# Altium PCB LED Matrix.PcbDoc
Units mil, origin at the board's own origin, x right, y up, seen from the top; angles counter-clockwise.
Board outline 3897.64 x 3897.64 mil, 4 copper layers (Top Layer, Layer 1, Layer 2, Bottom Layer), stack 23.756 mil thick; 139 components, 105 nets, 345 pads, 111 vias.
Unrouted connection lines stored in the file: 49.
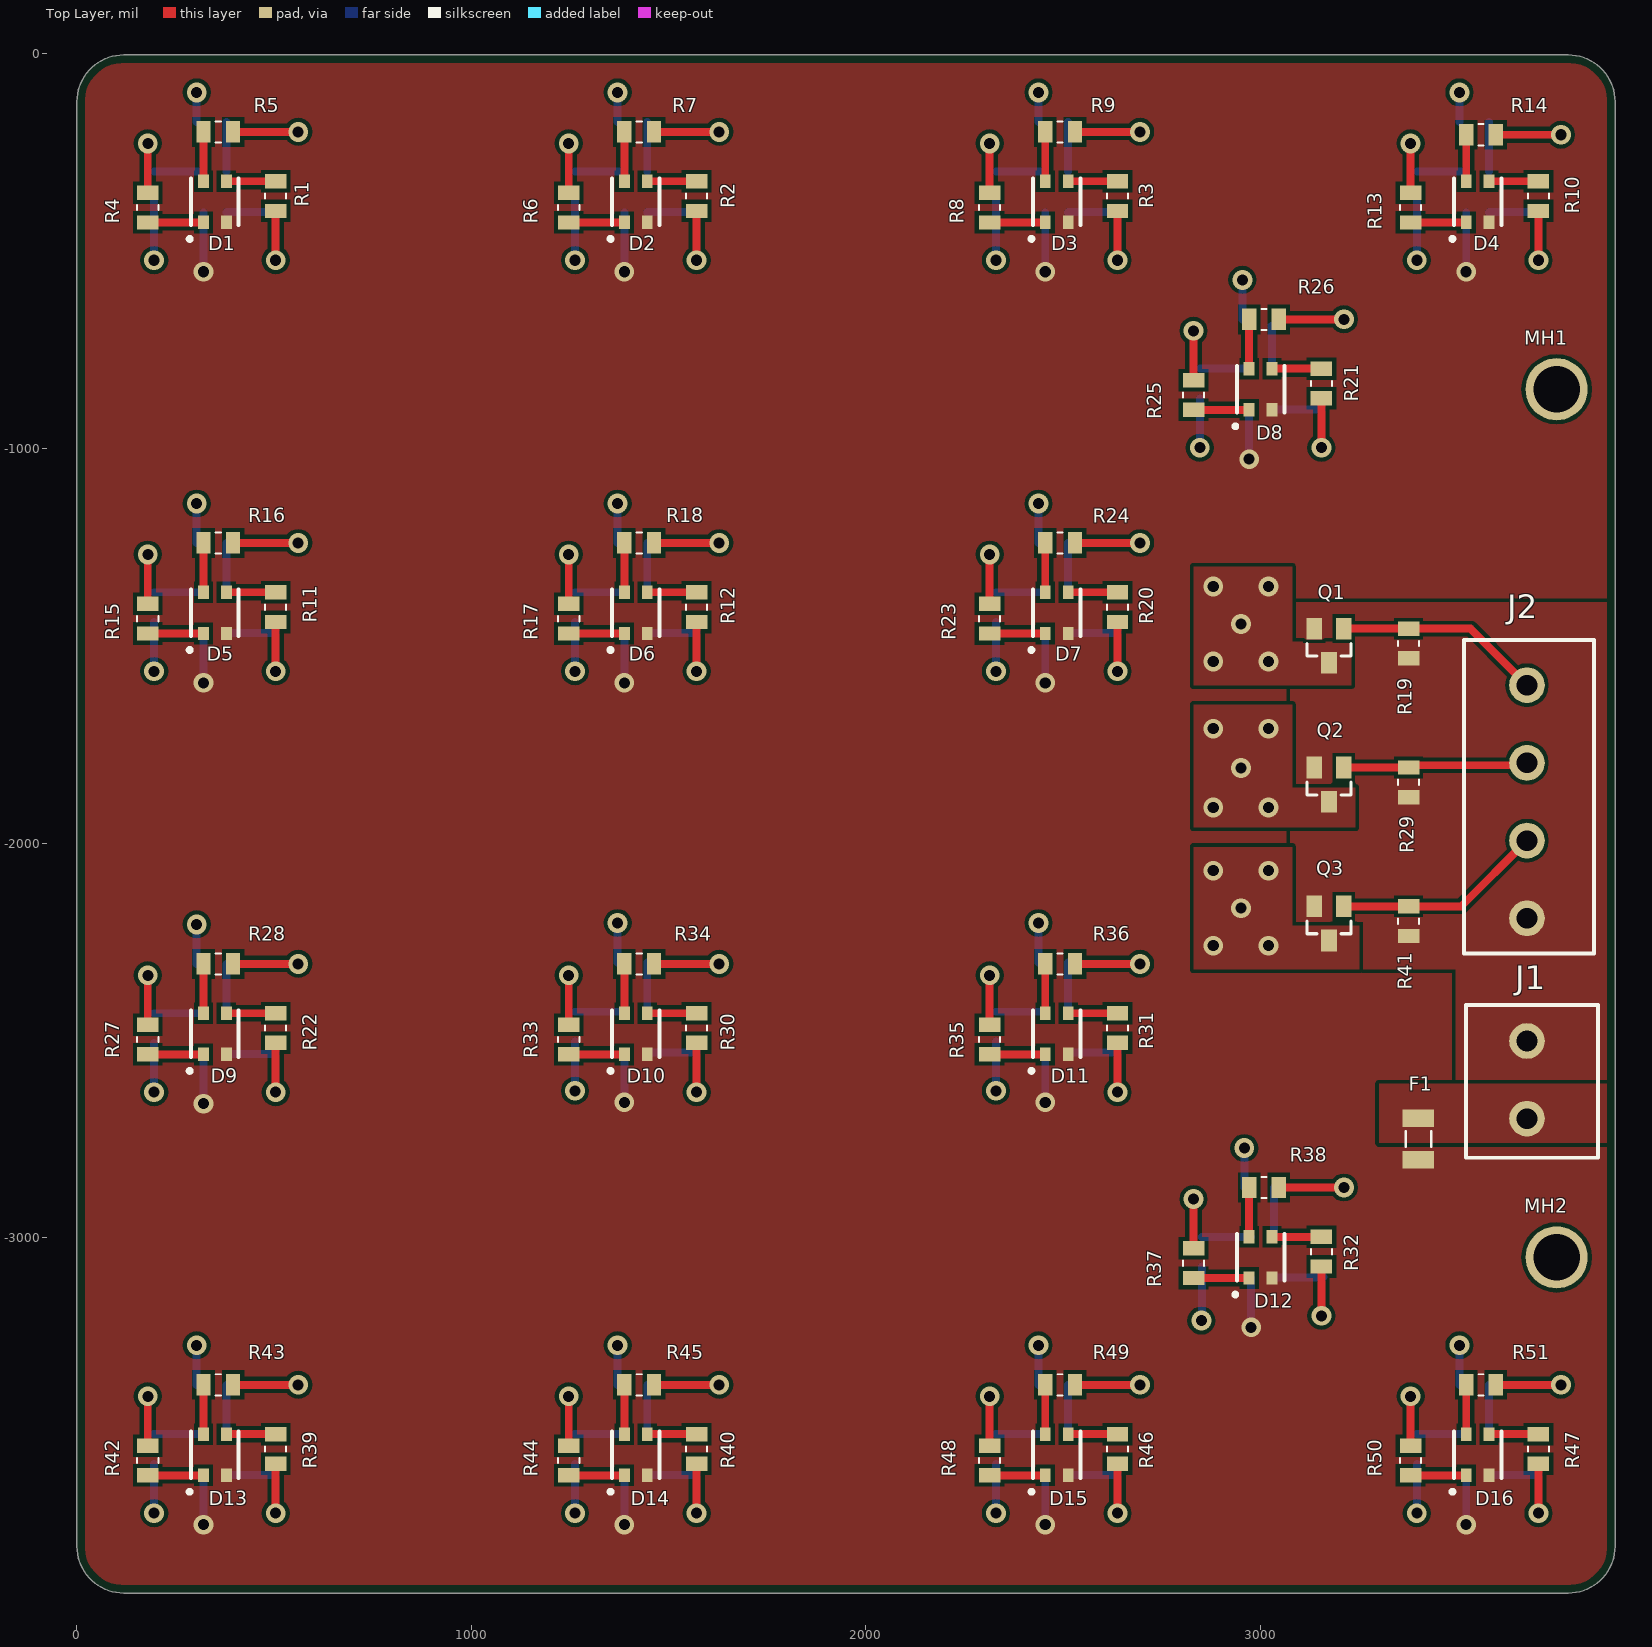
[diagram p0: Top Layer view]
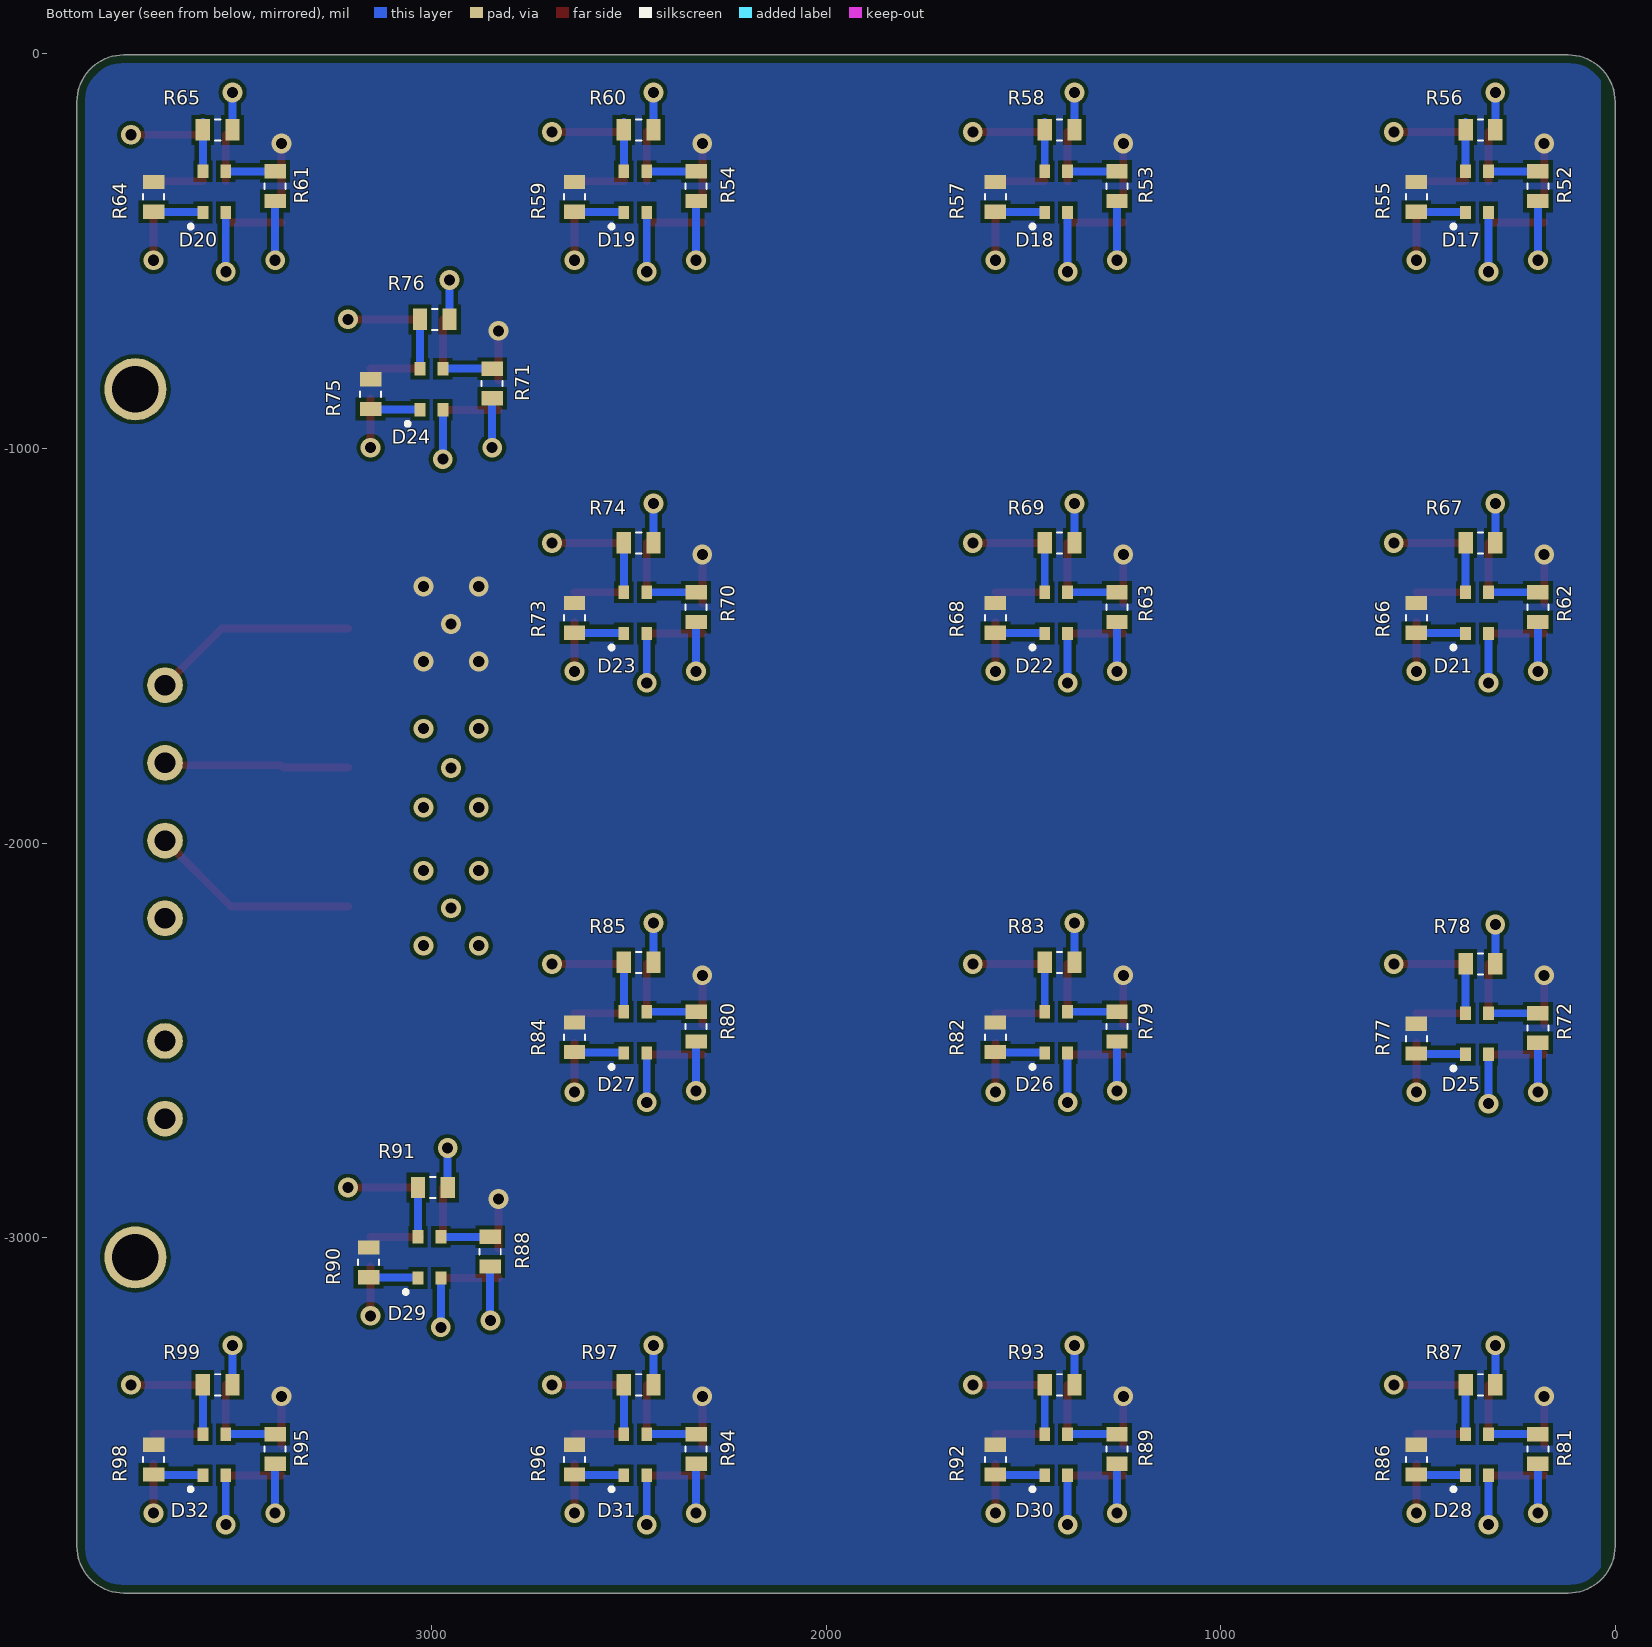
[diagram p1: Bottom Layer view, seen from below]
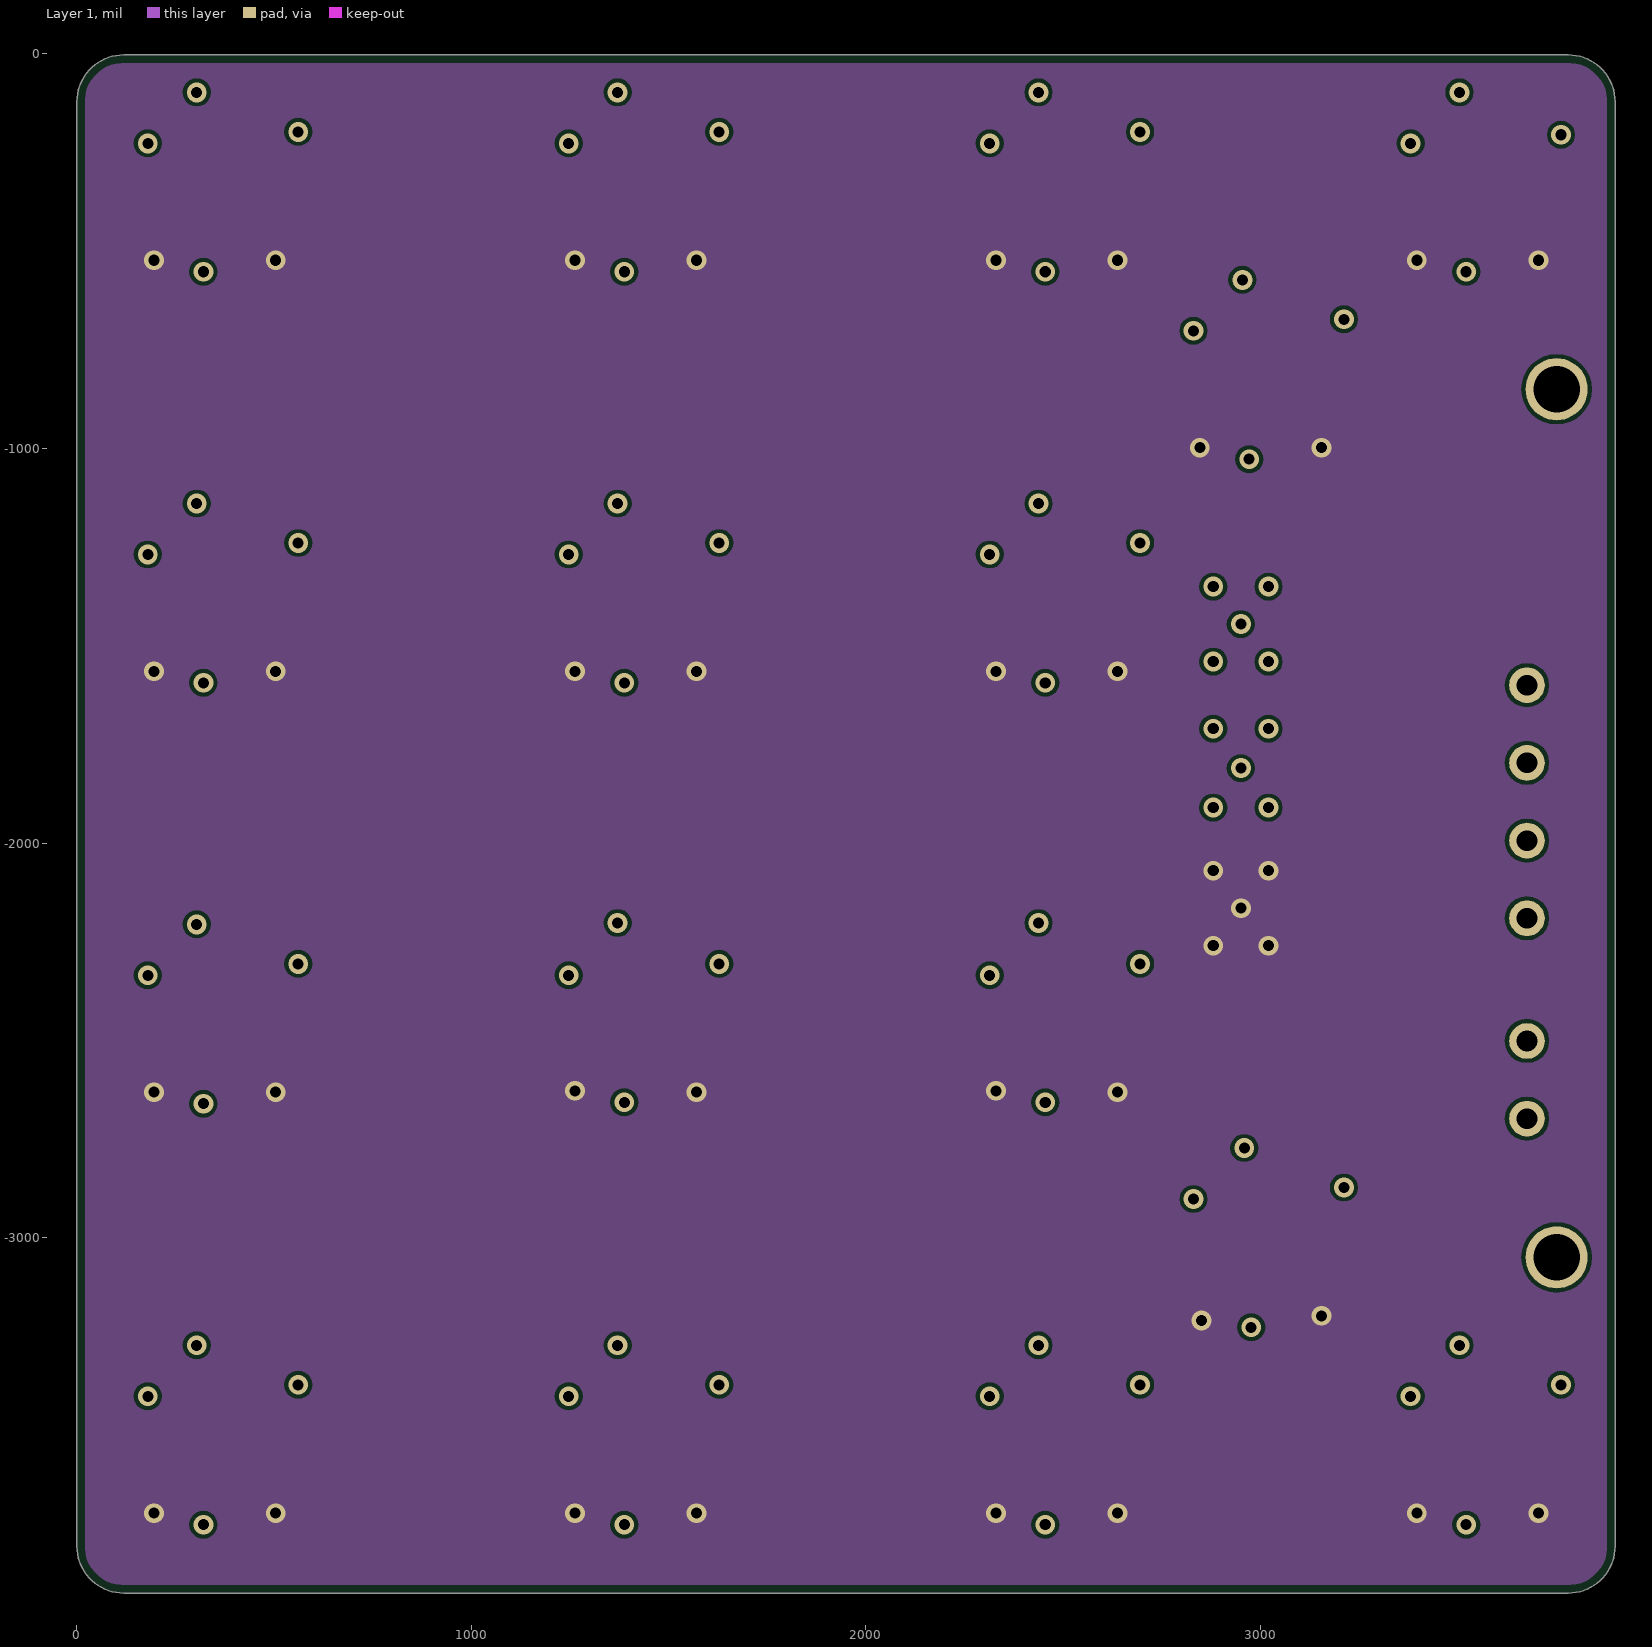
[diagram p2: Layer 1]
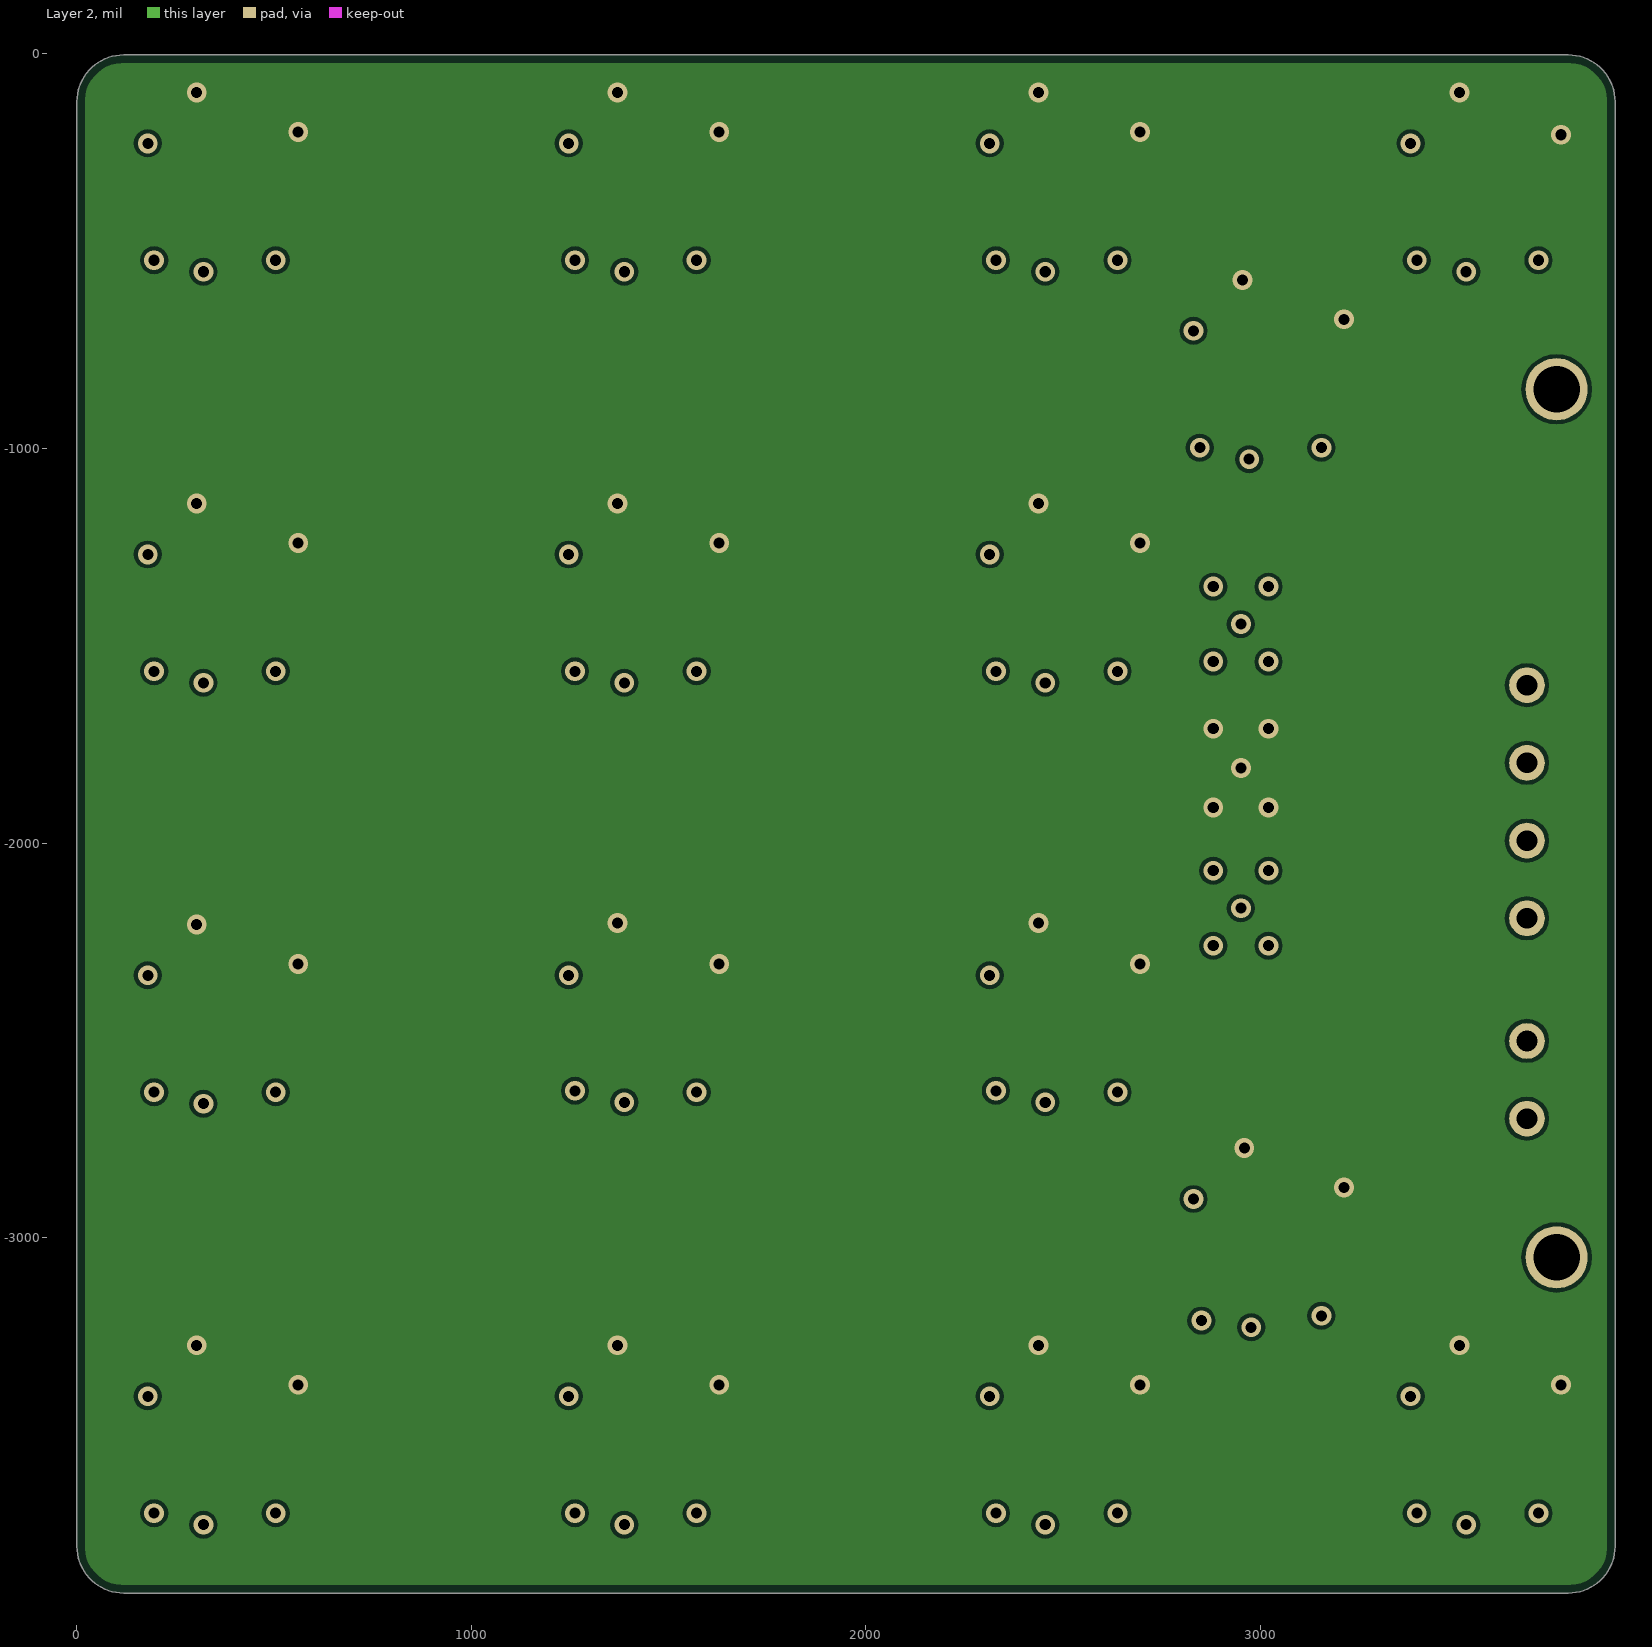
[diagram p3: Layer 2]
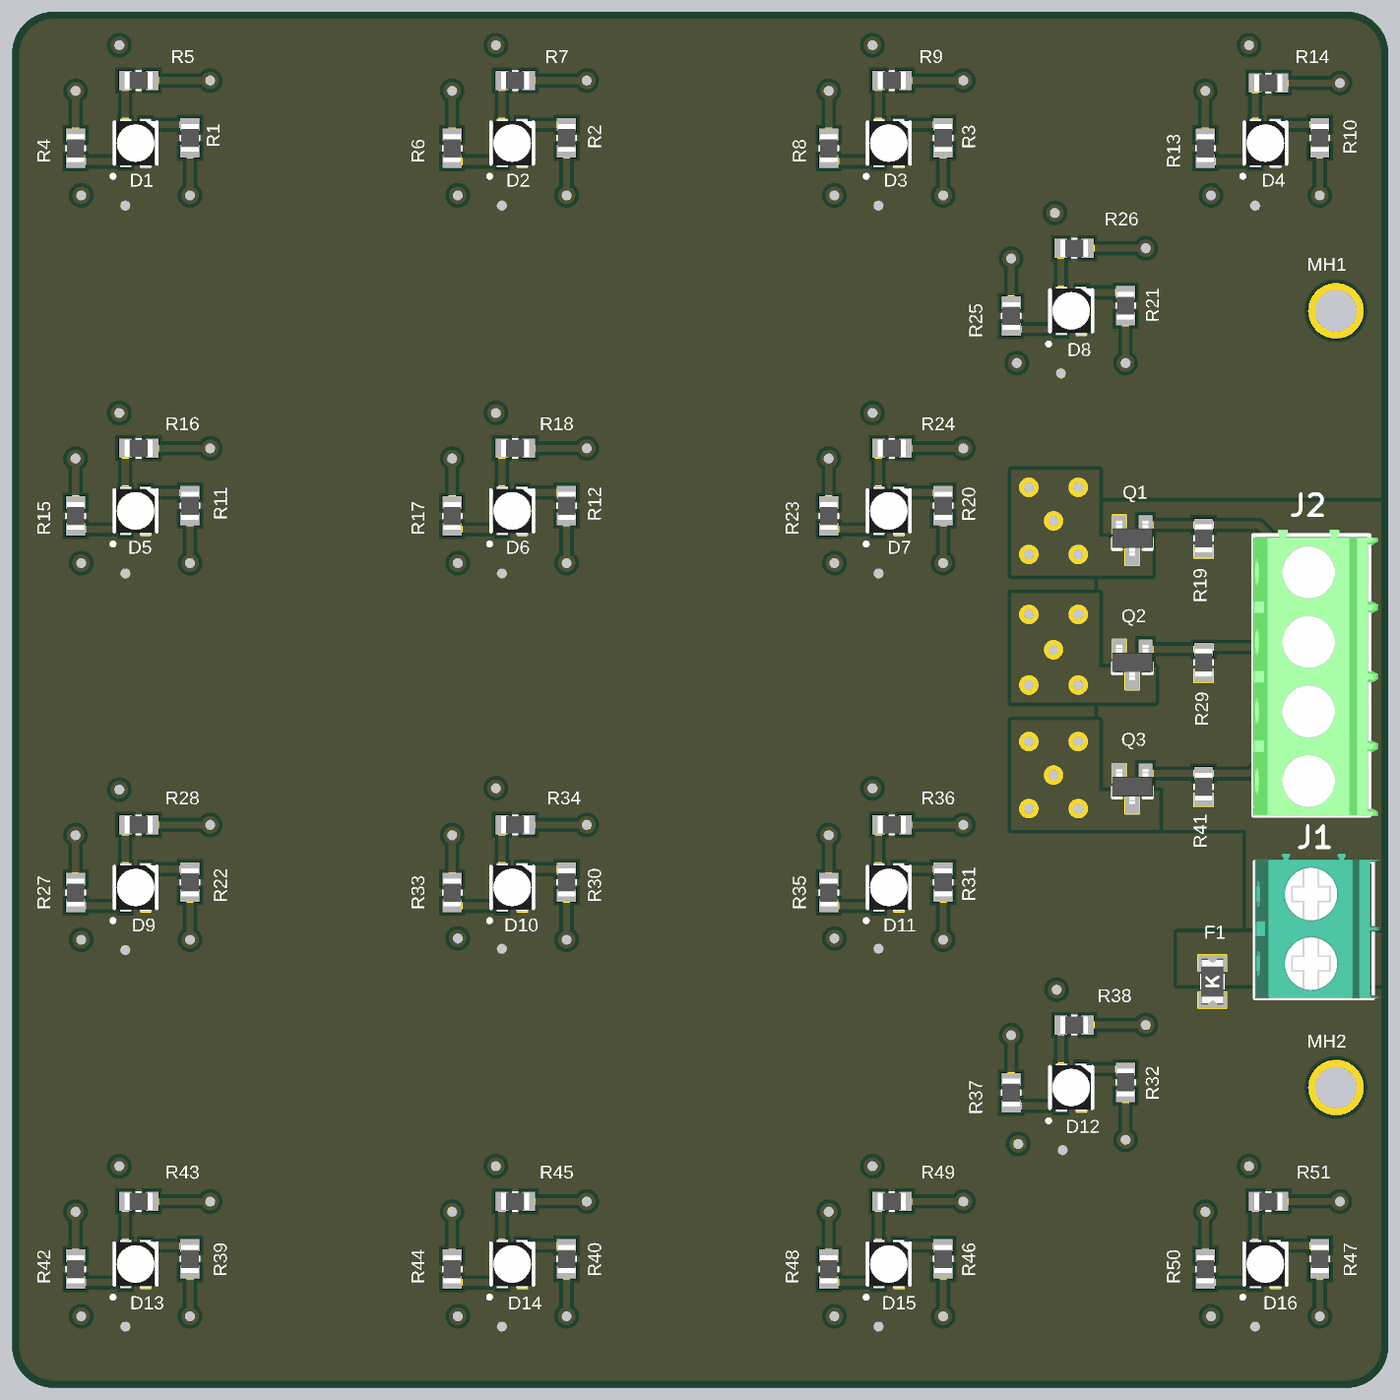
[diagram p4: 3D render of the assembled board from above, using the file's embedded part models]
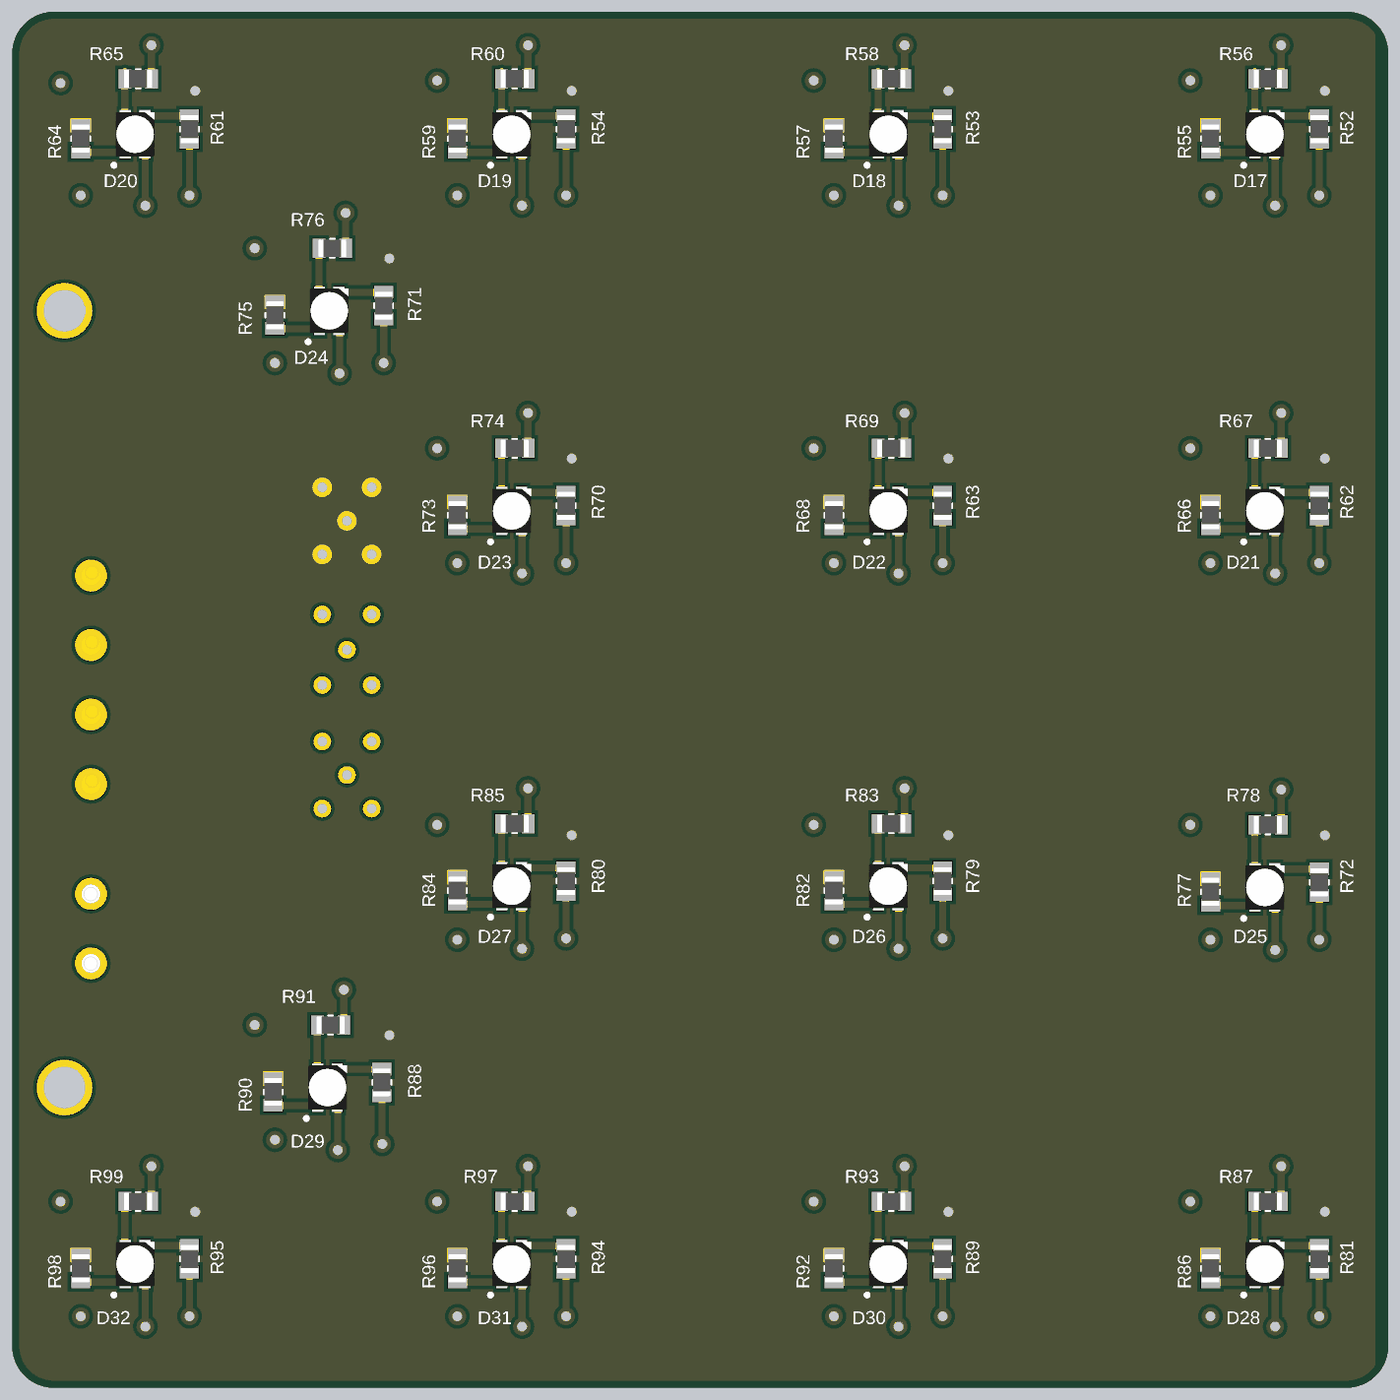
[diagram p5: 3D render of the assembled board from below, using the file's embedded part models]

## Layer stack, top to bottom
Top Solder: solder mask 0.4, Solder Resist, Dk 3.5
Top Layer: signal copper 1.4
Dielectric 2: prepreg 2.8, PP-006, Dk 4.1
Layer 1: signal copper 1.378
Dielectric 1: dielectric 12.6, FR-4, Dk 4.8
Layer 2: signal copper 1.378
Dielectric 3: prepreg 2.8, PP-006, Dk 4.1
Bottom Layer: signal copper 1.4
Bottom Solder: solder mask 0.4, Solder Resist, Dk 3.5

## Board outline
0.5,-3782.39 0.5,-120.97 cw(c118.61,-120.97) 118.61,-2.86 3780.03,-2.86 cw(c3780.03,-120.97) 3898.14,-120.97 3898.14,-3782.39 cw(c3780.03,-3782.39) 3780.03,-3900.5 118.61,-3900.5 cw(c118.61,-3782.39)

## Design rules (kind name [scope] priority, off if disabled: settings)
BoardOutlineClearance [All] p1: gap=20 ignorepadtopadclearanceinfootprint=FALSE
Clearance "Clearance Polygons" [InPolygon] p1: gap=10 ignorepadtopadclearanceinfootprint=FALSE except(0: Arc-Hole Track-Hole SMDPad-Hole THPad-Hole Via-Hole Fill-Hole Poly-Hole Region-Hole Text-Hole)
Clearance [All] p2: gap=5 ignorepadtopadclearanceinfootprint=FALSE except(0: Arc-Hole Track-Hole SMDPad-Hole THPad-Hole Via-Hole Fill-Hole Poly-Hole Region-Hole Text-Hole)
ComponentClearance "HM-TRP & UFL" [InComponent('X1') vs InComponent('U1')] p1: gap=0 collisioncheckmode=3 verticalgap=0 showdistances=FALSE
ComponentClearance [All] p2: gap=1 collisioncheckmode=3 verticalgap=1 showdistances=FALSE
DiffPairsRouting [All] p1: maxlimit=393.7 minlimit=5 mostfreqgap=8 toplayer_minwidth=5 toplayer_maxwidth=15 toplayer_prefwidth=8 midlayer1_minwidth=5 midlayer1_maxwidth=15 midlayer1_prefwidth=8 midlayer2_minwidth=5 midlayer2_maxwidth=15 midlayer2_prefwidth=8 bottomlayer_minwidth=5 bottomlayer_maxwidth=15 bottomlayer_prefwidth=8 maxuncoupledlength=500
HoleSize [All] p1: absolutevalues=TRUE maxlimit=265 minlimit=10 maxpercent=80.000 minpercent=20.000
HoleToHoleClearance [All] p1: gap=10 allowstackedmicrovias=FALSE
MinimumAnnularRing [All] p1: minimumring=4
MinimumSolderMaskSliver [All] p1: minsoldermaskwidth=0
PlaneClearance [All] p1: clearance=10
PlaneConnect [All] p1: planeconnectstyle=Relief reliefexpansion=4 reliefentries=4 reliefconductorwidth=6 reliefairgap=6
PolygonConnect "Via connect style" [isVia] p1: connectstyle=Direct reliefconductorwidth=10 reliefentries=4 polygonreliefangle="90 Angle" airgapwidth=10
PolygonConnect [All] p2: connectstyle=Direct reliefconductorwidth=10 reliefentries=4 polygonreliefangle="90 Angle" airgapwidth=6
RoutingCorners [All] p1: cornerstyle=45-Degree minsetback=49.21 maxsetback=49.21
RoutingVias [All] p1: holewidth=12 width=22 viastyle="Through Hole" minholewidth=10 minwidth=18 maxholewidth=100 maxwidth=114
SilkToSilkClearance [All] p1: silktosilkclearance=0
SilkToSolderMaskClearance [IsPad] p1: minsilkscreentomaskgap=5 clearancetoexposedcopper=TRUE
SolderMaskExpansion [All] p1: expansion=2.5 istentingtop=FALSE
Width GND [InNet('GND')] p1: maxlimit=30 minlimit=10 preferedwidth=20
Width Power [InNetClass('Power')] p2: maxlimit=40 minlimit=20 preferedwidth=30
Width 3V3 [InNetClass('3V3')] p3: maxlimit=30 minlimit=10 preferedwidth=20
Width [All] p4: maxlimit=400 minlimit=6 preferedwidth=20 minimp=50.000000 maximp=50.000000 favimp=50.000000
20 further rules are at their usual default settings.

## Classes and differential pairs
component class "LED Matrix-2": D17 D18 D19 D20 D21 D22 D23 D24 D25 D26 D27 D28 D29 D30 D31 D32 R52 R53 R54 R55 R56 R57 R58 R59 R60 R61 R62 R63 R64 R65 R66 R67 R68 R69 R70 R71 R72 R73 R74 R75 R76 R77 R78 R79 R80 R81 R82 R83 R84 R85 R86 R87 R88 R89 R90 R91 R92 R93 R94 R95 R96 R97 R98 R99
component class "LED Matrix": D1 D2 D3 D4 D5 D6 D7 D8 D9 D10 D11 D12 D13 D14 D15 D16 F1 J1 J2 MH1 MH2 Q Q1 Q2 Q3 R1 R2 R3 R4 R5 R6 R7 R8 R9 R10 R11 R12 R13 R14 R15 R16 R17 R18 R19 R20 R21 R22 R23 R24 R25 R26 R27 R28 R29 R30 R31 R32 R33 R34 R35 R36 R37 R38 R39 R40 R41 R42 R43 R44 R45 R46 R47 R48 R49 R50 R51

## Components (designator, comment, footprint, x,y, rotation, side; value= is the part's Value field where it differs from the comment)
D1 "LED_RGB" LED_RGB 350,-375 r0 top
D2 "LED_RGB" LED_RGB 1416.67,-375 r0 top
D3 "LED_RGB" LED_RGB 2483.33,-375 r0 top
D4 "LED_RGB" LED_RGB 3550,-375 r0 top
D5 "LED_RGB" LED_RGB 350,-1416.67 r0 top
D6 "LED_RGB" LED_RGB 1416.67,-1416.67 r0 top
D7 "LED_RGB" LED_RGB 2483.33,-1416.67 r0 top
D8 "LED_RGB" LED_RGB 3000,-850 r0 top
D9 "LED_RGB" LED_RGB 350,-2483.33 r0 top
D10 "LED_RGB" LED_RGB 1416.67,-2483.33 r0 top
D11 "LED_RGB" LED_RGB 2483.33,-2483.33 r0 top
D12 "LED_RGB" LED_RGB 3000,-3050 r0 top
D13 "LED_RGB" LED_RGB 350,-3550 r0 top
D14 "LED_RGB" LED_RGB 1416.67,-3550 r0 top
D15 "LED_RGB" LED_RGB 2483.33,-3550 r0 top
D16 "LED_RGB" LED_RGB 3550,-3550 r0 top
D17 "LED_RGB" LED_RGB 350,-350 r180 bottom
D18 "LED_RGB" LED_RGB 1416.67,-350 r180 bottom
D19 "LED_RGB" LED_RGB 2483.33,-350 r180 bottom
D20 "LED_RGB" LED_RGB 3550,-350 r180 bottom
D21 "LED_RGB" LED_RGB 350,-1416.67 r180 bottom
D22 "LED_RGB" LED_RGB 1416.67,-1416.67 r180 bottom
D23 "LED_RGB" LED_RGB 2483.33,-1416.67 r180 bottom
D24 "LED_RGB" LED_RGB 3000,-850 r180 bottom
D25 "LED_RGB" LED_RGB 350,-2483.33 r180 bottom
D26 "LED_RGB" LED_RGB 1416.67,-2479.69 r180 bottom
D27 "LED_RGB" LED_RGB 2483.33,-2479.69 r180 bottom
D28 "LED_RGB" LED_RGB 350,-3550 r180 bottom
D29 "LED_RGB" LED_RGB 3005,-3050 r180 bottom
D30 "LED_RGB" LED_RGB 1416.67,-3550 r180 bottom
D31 "LED_RGB" LED_RGB 2483.33,-3550 r180 bottom
D32 "LED_RGB" LED_RGB 3550,-3550 r180 bottom
F1 "FUSE_3A_1206" FUSE_1206 3400,-2750 r90 top
J1 "CON_2M_TERM" 1935161 3675,-2600 r90 top
J2 "CON_4M_TERM" 1935187 3675,-1895.28 r270 top
MH1 "MOUNTING_HOLES" MOUNTING_HOLE 3750,-850 r0 top
MH2 "MOUNTING_HOLES" MOUNTING_HOLE 3750,-3050 r0 top
Q1 "NMOS_30V_2.2A" NMOS_SSOT-3 3173.28,-1500 r180 top
Q2 "NMOS_30V_2.2A" NMOS_SSOT-3 3173.28,-1851.85 r180 top
Q3 "NMOS_30V_2.2A" NMOS_SSOT-3 3173.28,-2203.7 r180 top
R1 "RES_1kΩ_0805" RESC2012X60N 504.04,-360.43 r270 top value=1kΩ
R2 "RES_1kΩ_0805" RESC2012X60N 1570.7,-360.43 r270 top value=1kΩ
R3 "RES_1kΩ_0805" RESC2012X60N 2637.37,-360.43 r270 top value=1kΩ
R4 "RES_1kΩ_0805" RESC2012X60N 180,-389.57 r270 top value=1kΩ
R5 "RES_1kΩ_0805" RESC2012X60N 358.56,-197.84 r0 top value=1kΩ
R6 "RES_1kΩ_0805" RESC2012X60N 1246.67,-389.57 r270 top value=1kΩ
R7 "RES_1kΩ_0805" RESC2012X60N 1425.23,-197.84 r0 top value=1kΩ
R8 "RES_1kΩ_0805" RESC2012X60N 2313.33,-389.57 r270 top value=1kΩ
R9 "RES_1kΩ_0805" RESC2012X60N 2491.9,-197.84 r0 top value=1kΩ
R10 "RES_1kΩ_0805" RESC2012X60N 3704.04,-360.43 r270 top value=1kΩ
R11 "RES_1kΩ_0805" RESC2012X60N 504.04,-1402.1 r270 top value=1kΩ
R12 "RES_1kΩ_0805" RESC2012X60N 1570.7,-1402.1 r270 top value=1kΩ
R13 "RES_1kΩ_0805" RESC2012X60N 3380,-389.57 r270 top value=1kΩ
R14 "RES_1kΩ_0805" RESC2012X60N 3558.56,-205 r0 top value=1kΩ
R15 "RES_1kΩ_0805" RESC2012X60N 180,-1431.23 r270 top value=1kΩ
R16 "RES_1kΩ_0805" RESC2012X60N 358.56,-1239.5 r0 top value=1kΩ
R17 "RES_1kΩ_0805" RESC2012X60N 1246.67,-1431.23 r270 top value=1kΩ
R18 "RES_1kΩ_0805" RESC2012X60N 1425.23,-1239.5 r0 top value=1kΩ
R19 "RES_1kΩ_0805" RESC2012X60N 3375,-1494.29 r90 top value=1kΩ
R20 "RES_1kΩ_0805" RESC2012X60N 2637.37,-1402.1 r90 top value=1kΩ
R21 "RES_1kΩ_0805" RESC2012X60N 3154.04,-835.43 r90 top value=1kΩ
R22 "RES_1kΩ_0805" RESC2012X60N 504.04,-2468.77 r90 top value=1kΩ
R23 "RES_1kΩ_0805" RESC2012X60N 2313.33,-1431.23 r90 top value=1kΩ
R24 "RES_1kΩ_0805" RESC2012X60N 2491.9,-1239.5 r0 top value=1kΩ
R25 "RES_1kΩ_0805" RESC2012X60N 2830,-864.57 r270 top value=1kΩ
R26 "RES_1kΩ_0805" RESC2012X60N 3008.56,-672.84 r0 top value=1kΩ
R27 "RES_1kΩ_0805" RESC2012X60N 180,-2497.9 r270 top value=1kΩ
R28 "RES_1kΩ_0805" RESC2012X60N 358.56,-2306.17 r0 top value=1kΩ
R29 "RES_1kΩ_0805" RESC2012X60N 3375,-1846.14 r90 top value=1kΩ
R30 "RES_1kΩ_0805" RESC2012X60N 1570.7,-2468.77 r270 top value=1kΩ
R31 "RES_1kΩ_0805" RESC2012X60N 2637.37,-2468.77 r270 top value=1kΩ
R32 "RES_1kΩ_0805" RESC2012X60N 3154.04,-3035.43 r270 top value=1kΩ
R33 "RES_1kΩ_0805" RESC2012X60N 1246.67,-2497.9 r270 top value=1kΩ
R34 "RES_1kΩ_0805" RESC2012X60N 1425.23,-2306.17 r0 top value=1kΩ
R35 "RES_1kΩ_0805" RESC2012X60N 2313.33,-2497.9 r270 top value=1kΩ
R36 "RES_1kΩ_0805" RESC2012X60N 2491.9,-2306.17 r0 top value=1kΩ
R37 "RES_1kΩ_0805" RESC2012X60N 2830,-3064.57 r270 top value=1kΩ
R38 "RES_1kΩ_0805" RESC2012X60N 3008.56,-2872.84 r0 top value=1kΩ
R39 "RES_1kΩ_0805" RESC2012X60N 504.04,-3535.43 r90 top value=1kΩ
R40 "RES_1kΩ_0805" RESC2012X60N 1570.7,-3535.43 r270 top value=1kΩ
R41 "RES_1kΩ_0805" RESC2012X60N 3375,-2197.99 r90 top value=1kΩ
R42 "RES_1kΩ_0805" RESC2012X60N 180,-3564.57 r270 top value=1kΩ
R43 "RES_1kΩ_0805" RESC2012X60N 358.56,-3372.84 r0 top value=1kΩ
R44 "RES_1kΩ_0805" RESC2012X60N 1246.67,-3564.57 r270 top value=1kΩ
R45 "RES_1kΩ_0805" RESC2012X60N 1425.23,-3372.84 r0 top value=1kΩ
R46 "RES_1kΩ_0805" RESC2012X60N 2637.37,-3535.43 r270 top value=1kΩ
R47 "RES_1kΩ_0805" RESC2012X60N 3704.04,-3535.43 r270 top value=1kΩ
R48 "RES_1kΩ_0805" RESC2012X60N 2313.33,-3564.57 r270 top value=1kΩ
R49 "RES_1kΩ_0805" RESC2012X60N 2491.9,-3372.84 r0 top value=1kΩ
R50 "RES_1kΩ_0805" RESC2012X60N 3380,-3564.57 r270 top value=1kΩ
R51 "RES_1kΩ_0805" RESC2012X60N 3558.56,-3372.84 r0 top value=1kΩ
R52 "RES_1kΩ_0805" RESC2012X60N 195.96,-335.43 r270 bottom value=1kΩ
R53 "RES_1kΩ_0805" RESC2012X60N 1262.63,-335.43 r270 bottom value=1kΩ
R54 "RES_1kΩ_0805" RESC2012X60N 2329.3,-335.43 r270 bottom value=1kΩ
R55 "RES_1kΩ_0805" RESC2012X60N 504.04,-362.4 r270 bottom value=1kΩ
R56 "RES_1kΩ_0805" RESC2012X60N 341.44,-192.84 r180 bottom value=1kΩ
R57 "RES_1kΩ_0805" RESC2012X60N 1570.7,-362.4 r270 bottom value=1kΩ
R58 "RES_1kΩ_0805" RESC2012X60N 1408.1,-192.84 r180 bottom value=1kΩ
R59 "RES_1kΩ_0805" RESC2012X60N 2637.37,-362.4 r270 bottom value=1kΩ
R60 "RES_1kΩ_0805" RESC2012X60N 2474.77,-192.84 r180 bottom value=1kΩ
R61 "RES_1kΩ_0805" RESC2012X60N 3395.96,-335.43 r270 bottom value=1kΩ
R62 "RES_1kΩ_0805" RESC2012X60N 195.96,-1402.1 r270 bottom value=1kΩ
R63 "RES_1kΩ_0805" RESC2012X60N 1262.63,-1402.1 r270 bottom value=1kΩ
R64 "RES_1kΩ_0805" RESC2012X60N 3704.03,-362.4 r270 bottom value=1kΩ
R65 "RES_1kΩ_0805" RESC2012X60N 3541.44,-192.84 r180 bottom value=1kΩ
R66 "RES_1kΩ_0805" RESC2012X60N 504.04,-1429.07 r270 bottom value=1kΩ
R67 "RES_1kΩ_0805" RESC2012X60N 341.44,-1239.5 r180 bottom value=1kΩ
R68 "RES_1kΩ_0805" RESC2012X60N 1570.7,-1429.07 r270 bottom value=1kΩ
R69 "RES_1kΩ_0805" RESC2012X60N 1408.1,-1239.5 r180 bottom value=1kΩ
R70 "RES_1kΩ_0805" RESC2012X60N 2329.3,-1402.1 r270 bottom value=1kΩ
R71 "RES_1kΩ_0805" RESC2012X60N 2845.96,-835.43 r270 bottom value=1kΩ
R72 "RES_1kΩ_0805" RESC2012X60N 195.96,-2468.77 r270 bottom value=1kΩ
R73 "RES_1kΩ_0805" RESC2012X60N 2637.37,-1429.07 r270 bottom value=1kΩ
R74 "RES_1kΩ_0805" RESC2012X60N 2474.77,-1239.5 r180 bottom value=1kΩ
R75 "RES_1kΩ_0805" RESC2012X60N 3154.03,-862.4 r270 bottom value=1kΩ
R76 "RES_1kΩ_0805" RESC2012X60N 2991.44,-672.83 r180 bottom value=1kΩ
R77 "RES_1kΩ_0805" RESC2012X60N 504.04,-2495.73 r270 bottom value=1kΩ
R78 "RES_1kΩ_0805" RESC2012X60N 341.44,-2306.17 r180 bottom value=1kΩ
R79 "RES_1kΩ_0805" RESC2012X60N 1262.63,-2465.13 r270 bottom value=1kΩ
R80 "RES_1kΩ_0805" RESC2012X60N 2329.3,-2465.13 r270 bottom value=1kΩ
R81 "RES_1kΩ_0805" RESC2012X60N 195.96,-3535.43 r270 bottom value=1kΩ
R82 "RES_1kΩ_0805" RESC2012X60N 1570.7,-2492.09 r270 bottom value=1kΩ
R83 "RES_1kΩ_0805" RESC2012X60N 1408.1,-2302.53 r180 bottom value=1kΩ
R84 "RES_1kΩ_0805" RESC2012X60N 2637.37,-2492.09 r270 bottom value=1kΩ
R85 "RES_1kΩ_0805" RESC2012X60N 2474.77,-2302.53 r180 bottom value=1kΩ
R86 "RES_1kΩ_0805" RESC2012X60N 504.04,-3562.4 r270 bottom value=1kΩ
R87 "RES_1kΩ_0805" RESC2012X60N 341.44,-3372.83 r180 bottom value=1kΩ
R88 "RES_1kΩ_0805" RESC2012X60N 2850.96,-3035.43 r270 bottom value=1kΩ
R89 "RES_1kΩ_0805" RESC2012X60N 1262.63,-3535.43 r270 bottom value=1kΩ
R90 "RES_1kΩ_0805" RESC2012X60N 3159.03,-3062.4 r270 bottom value=1kΩ
R91 "RES_1kΩ_0805" RESC2012X60N 2996.44,-2872.83 r180 bottom value=1kΩ
R92 "RES_1kΩ_0805" RESC2012X60N 1570.7,-3562.4 r270 bottom value=1kΩ
R93 "RES_1kΩ_0805" RESC2012X60N 1408.1,-3372.83 r180 bottom value=1kΩ
R94 "RES_1kΩ_0805" RESC2012X60N 2329.3,-3535.43 r270 bottom value=1kΩ
R95 "RES_1kΩ_0805" RESC2012X60N 3395.96,-3535.43 r270 bottom value=1kΩ
R96 "RES_1kΩ_0805" RESC2012X60N 2637.37,-3562.4 r270 bottom value=1kΩ
R97 "RES_1kΩ_0805" RESC2012X60N 2474.77,-3372.83 r180 bottom value=1kΩ
R98 "RES_1kΩ_0805" RESC2012X60N 3704.03,-3562.4 r270 bottom value=1kΩ
R99 "RES_1kΩ_0805" RESC2012X60N 3541.44,-3372.83 r180 bottom value=1kΩ

## Footprints (in the part's own frame and the unit in brackets; to place one, negate y for a bottom-side part, rotate by r counter-clockwise, add the part's x,y. Pads: shape width x height; smd on the part's side, far side on the other; paste and mask are expansions set on the pad)
1935161 [mm]
  round 2.3 hole 1.325: 1(-2.5,0) 2(2.5,0)
  silkscreen extent -5.01,-4.57 4.83,3.94, body extent -5.01,-5.06 5.39,3.94, height 11.41
1935187 [mm]
  round 2.3 hole 1.325: 1(-7.5,0) 2(-2.5,0) 3(2.5,0) 4(7.5,0)
  silkscreen extent -10.41,-4.06 9.78,4.32, body extent -10.79,-4.06 9.78,4.94, height 11.41
FUSE_1206 [mil]
  rect 45x80 smd: 1(-52.5,0) 2(52.5,0)
  silkscreen extent -20,-32 20,32, body extent -65,-32 65,32, height 32
LED_RGB [mm]
  rect 0.7x0.86 smd: 1(-0.737,-1.325) 2(-0.737,1.325) 3(0.738,1.325) 4(0.738,-1.325)
  silkscreen extent -1.75,-2.51 1.53,1.5, body extent -1.4,-1.75 1.4,1.75, height 1.89
MOUNTING_HOLE [mm]
  round 4 hole 3 unplated: 0(0,0)
NMOS_SSOT-3 [mm]
  rect 1x1.4 smd: 1(-0.95,-1.1) 2(0.95,-1.1) 3(0,1.1)
  silkscreen extent -1.42,-0.15 1.42,0.66, body extent -1.46,-1.41 1.46,1.1, height 1.12
RESC2012X60N [mm]
  rect 0.92x1.38 smd: 1(-0.955,0) 2(0.955,0)
  silkscreen extent -0.17,-0.68 0.17,0.68, body extent -1,-0.62 1,0.62, height 0.6

## Part data
D1 D2 D3 D4 D5 D6 D7 D8 D9 D10 D11 D12 D13 D14 D15 D16 D17 D18 D19 D20 D21 D22 D23 D24 D25 D26 D27 D28 D29 D30 D31 D32: "LED RGB DIFFUSED 4PLCC SMD", Case/Package=PLCC, Color=Blue,Green,Red, Forward Voltage=3.1V, Lens Color=White, Manufacturer 1=Broadcom, Manufacturer Part Number 1=ASMB-MTB1-0A3A2, Supplier Part Number 1=516-3280-1-ND, Test Current=20mA, ComponentLink1Description=http://www.farnell.com/datasheets/2111106.pdf?src-supplier=Farnell, ComponentLink1URL=http://www.farnell.com/datasheets/2111106.pdf?src-supplier=Farnell, ComponentLink2Description=https://docs.broadcom.com/docs/AV02-4194EN?src-supplier=Digi-Key, ComponentLink2URL=https://docs.broadcom.com/docs/AV02-4194EN?src-supplier=Digi-Key, ComponentLink3Description=http://www.farnell.com/datasheets/1801564.pdf?src-supplier=Element14, ComponentLink3URL=http://www.farnell.com/datasheets/1801564.pdf?src-supplier=Element14, ComponentLink4Description=http://www.farnell.com/datasheets/2111106.pdf?src-supplier=Newark, ComponentLink4URL=http://www.farnell.com/datasheets/2111106.pdf?src-supplier=Newark, Dominant Wavelength=470nm, Height=1.9mm, Length=3.2mm, Lens Style=Round, Lens Transparency=Diffused, Luminous Intensity=350mcd, Mount="Surface Mount", Number of Pins=4, Packaging="Cut Tape", Pricing 1="1=0.60000, 10=0.47100, 100=0.30210, 500=0.25980, 1000=0.20059 (USD)", REACH SVHC="No SVHC", RoHS=Yes, Stock 1=142531, Supplier 1=Digi-Key, Viewing Angle=115°, Width=2.8mm
F1: "FUSE SMD 3A 32V 1206", Case Code (Imperial)=1206, Case Code (Metric)=3216, Current Rating=3A, DC Cold Resistance=0.02R, Manufacturer 1=Littelfuse, Manufacturer Part Number 1=0466003.NR, Max Operating Temperature=90°C, Min Operating Temperature=-55°C, Package Quantity=5000, Power Dissipation=228mW, Supplier Part Number 1=F1458CT-ND, Voltage Rating (AC)=32V, Approvals=UL,CSA, Case/Package=1206, Composition="Thin Film", Fuse Current=3A, Fuse Type="Board Mount (Cartridge Style Excluded)", Height=0.023inch, Lead Free="Lead Free", Length=3.18mm, Mount="Surface Mount", Number of Pins=2, Packaging="Cut Tape", Pricing 1="1=1.20000, 5=1.16600, 10=1.09100, 50=0.90280, 100=0.75240, 250=0.73360, 500=0.62074, 1000=0.54549 (USD)", Radiation Hardening=No, REACH SVHC=Unknown, Resistance=0.02R, Response Time="Fast Blow", RoHS=Yes, Stock 1=10729, Supplier 1=Digi-Key, Voltage Rating (DC)=32V, Width=1.52mm, Working Voltage=32V
J1: "TERM BLK 2POS SIDE ENTRY 5MM", Color=Green, Current=18A, Current Rating=17.5A, Flammability Rating="UL94 V-0", Manufacturer 1="Phoenix Contact", Manufacturer Part Number 1=1935161, Max Current Rating=16A, Max Supply Voltage=250V, Package Quantity=250, Supplier Part Number 1=277-1667-ND, Voltage=300V, Voltage Rating (DC)=320V, Approvals=UL, ComponentLink1Description=https://datasheet.ciiva.com/15169/getdatasheetpartid-177903-15169663.pdf?src-supplier=Verical, ComponentLink1URL=https://datasheet.ciiva.com/15169/getdatasheetpartid-177903-15169663.pdf?src-supplier=Verical, ComponentLink2Description=https://datasheet.ciiva.com/16047/1935161-16047247.pdf?src-supplier=Onlinecomponents.com, ComponentLink2URL=https://datasheet.ciiva.com/16047/1935161-16047247.pdf?src-supplier=Onlinecomponents.com, ComponentLink3Description=https://datasheet.ciiva.com/824/combiconcompact5-0mmseries-824222.pdf?src-supplier=Digi-Key, ComponentLink3URL=https://datasheet.ciiva.com/824/combiconcompact5-0mmseries-824222.pdf?src-supplier=Digi-Key, Connector Type=Screw, Contact Material=Copper,Tin, Depth=9mm, Height=11.3mm, Housing Color=Green, Housing Material=Polyamide, Insulation Material=Nylon, Lead Free="Lead Free", Length=9mm, Material=Nylon, Mount="Through Hole", Number of Circuits=2, Number of Contacts=2, Number of Levels=1, Number of Pins=2, Number of Poles=2, Number of Positions=2, Number of Positions Per Level=2, Number of Rows=1, Orientation=Straight, Packaging=Bulk, Pitch=5mm, Pricing 1="1=0.43000, 10=0.41100, 50=0.39280, 100=0.38200, 250=0.35700, 500=0.32844, 1000=0.30350 (USD)", Radiation Hardening=No, REACH SVHC=Unknown, RoHS=Yes, Stock 1=15494, Supplier 1=Digi-Key, Termination=Solder, Voltage Rating=250V, Weight=0.067021oz, Width=14.9mm, Wire Gauge (Max)=26AWG, Wire Gauge (Min)=12AWG, Wire/Cable Gauge=26AWG
J2: "TERM BLK 4POS SIDE ENTRY 5MM PCB", Current=18A, Manufacturer 1="Phoenix Contact", Manufacturer Part Number 1=1935187, Supplier Part Number 1=277-1579-ND, Voltage=300V, Mounting Type="Through Hole", Pitch=5mm, Screw Thread=M2.6, Supplier 1=Digi-Key, Wire Gauge=12-26AWG, Wire Termination=Screw
MH1 MH2: "6cm x 6cm"
Q1 Q2 Q3: "MOSFET N-CH 30V 2.2A SSOT3", Case/Package=TO-236-3, Continuous Drain Current (ID)=2.2A, Drain to Source Breakdown Voltage=30V, Drain to Source Resistance=65mR, Gate to Source Voltage (Vgs)=8V, Input Capacitance=300pF, Manufacturer="ON Semiconductor / Fairchild", Manufacturer Part Number=FDN337N, Max Operating Temperature=150°C, Max Power Dissipation=500mW, Min Operating Temperature=-55°C, Package Quantity=1, Supplier Part Number 1=FDN337NCT-ND, Threshold Voltage=700mV, Category=MOSFETs, ComponentLink1Description=https://datasheet.ciiva.com:443/pdfs/VipMasterIC/IC/ONSM/ONSM-S-A0003158648/ONSM-S-A0003544357-1.pdf?src-supplier=IHS+Markit, ComponentLink1URL=https://datasheet.ciiva.com:443/pdfs/VipMasterIC/IC/ONSM/ONSM-S-A0003158648/ONSM-S-A0003544357-1.pdf?src-supplier=IHS+Markit, ComponentLink2Description=https://datasheet.ciiva.com/19470/871017-19470804.pdf?src-supplier=Jameco, ComponentLink2URL=https://datasheet.ciiva.com/19470/871017-19470804.pdf?src-supplier=Jameco, ComponentLink3Description=https://datasheet.ciiva.com/4442/fdn337n-44286-4442315.pdf?src-supplier=Mouser, ComponentLink3URL=https://datasheet.ciiva.com/4442/fdn337n-44286-4442315.pdf?src-supplier=Mouser, ComponentLink4Description=https://datasheet.ciiva.com/14092/fdn337n-eng-datasheet-14092051.pdf?src-supplier=Distrelec, ComponentLink4URL=https://datasheet.ciiva.com/14092/fdn337n-eng-datasheet-14092051.pdf?src-supplier=Distrelec, ComponentLink5Description=https://datasheet.ciiva.com/931/fdn337n-931875.pdf?src-supplier=Digi-Key, ComponentLink5URL=https://datasheet.ciiva.com/931/fdn337n-931875.pdf?src-supplier=Digi-Key, ComponentLink6Description=https://datasheet.ciiva.com/931/fdn337n-931876.pdf?src-supplier=Digi-Key, ComponentLink6URL=https://datasheet.ciiva.com/931/fdn337n-931876.pdf?src-supplier=Digi-Key, ComponentLink7Description=https://datasheet.ciiva.com/931/fdn337n-931877.pdf?src-supplier=Digi-Key, ComponentLink7URL=https://datasheet.ciiva.com/931/fdn337n-931877.pdf?src-supplier=Digi-Key, ComponentLink8Description=https://datasheet.ciiva.com/6037/fdn337n-6037720.pdf?src-supplier=Farnell, ComponentLink8URL=https://datasheet.ciiva.com/6037/fdn337n-6037720.pdf?src-supplier=Farnell, ComponentLink9Description=https://datasheet.ciiva.com/22681/220571-22681884.pdf?src-supplier=Element14, ComponentLink9URL=https://datasheet.ciiva.com/22681/220571-22681884.pdf?src-supplier=Element14, ComponentLink10Description=https://datasheet.ciiva.com/26144/fdn337n-26144222.pdf?src-supplier=Avnet+Europe, ComponentLink10URL=https://datasheet.ciiva.com/26144/fdn337n-26144222.pdf?src-supplier=Avnet+Europe, ComponentLink11Description=https://datasheet.ciiva.com/22655/220571-22655333.pdf?src-supplier=Element14, ComponentLink11URL=https://datasheet.ciiva.com/22655/220571-22655333.pdf?src-supplier=Element14, ComponentLink12Description=https://datasheet.ciiva.com/8115/fdn337n-8115063.pdf?src-supplier=Avnet, ComponentLink12URL=https://datasheet.ciiva.com/8115/fdn337n-8115063.pdf?src-supplier=Avnet, ComponentLink13Description=https://datasheet.ciiva.com/8115/fdn337n-8115069.pdf?src-supplier=Avnet, ComponentLink13URL=https://datasheet.ciiva.com/8115/fdn337n-8115069.pdf?src-supplier=Avnet, ComponentLink14Description=https://datasheet.ciiva.com/7968/220571-7968126.pdf?src-supplier=Element14, ComponentLink14URL=https://datasheet.ciiva.com/7968/220571-7968126.pdf?src-supplier=Element14, ComponentLink15Description=https://datasheet.ciiva.com/16931/fdn337n-16931214.pdf?src-supplier=Future+Electronics, ComponentLink15URL=https://datasheet.ciiva.com/16931/fdn337n-16931214.pdf?src-supplier=Future+Electronics, Contact Plating=Tin,Matte, Current Rating=2.2A, Drain to Source Voltage (Vdss)=30V, Dual Supply Voltage=30V, Element Configuration=Single, Fall Time=4ns, Height=0.94mm, Lead Free="Lead Free", Length=2.92mm, Mount="Surface Mount", Nominal Vgs=700mV, Number of Elements=1, Number of Pins=3, On-State Resistance=65mR, Packaging="Tape and Reel", Power Dissipation=500mW, Pricing 1="1=0.41000, 10=0.33100, 25=0.30280, 100=0.19010, 250=0.18796, 500=0.17600, 1000=0.11968 (USD)", Rds On Max=65mR, REACH SVHC="No SVHC", Rise Time=10ns, RoHS=Yes, Stock 1=287855, Supplier 1=Digi-Key, Termination=SMD/SMT, Turn-Off Delay Time=17ns, Turn-On Delay Time=4ns, Voltage Rating (DC)=30V, Weight=0.03g, Width=3.05mm
R1 R2 R3 R4 R5 R6 R7 R8 R9 R10 R11 R12 R13 R14 R15 R16 R17 R18 R19 R20 R21 R22 R23 R24 R25 R26 R27 R28 R29 R30 R31 R32 R33 R34 R35 R36 R37 R38 R39 R40 R41 R42 R43 R44 R45 R46 R47 R48 R49 R50 R51 R52 R53 R54 R55 R56 R57 R58 R59 R60 R61 R62 R63 R64 R65 R66 R67 R68 R69 R70 R71 R72 R73 R74 R75 R76 R77 R78 R79 R80 R81 R82 R83 R84 R85 R86 R87 R88 R89 R90 R91 R92 R93 R94 R95 R96 R97 R98 R99: "RES SMD 1K OHM 1% 1/8W 0805", Case Code (Imperial)=0805, Case Code (Metric)=2012, Manufacturer 1=Yageo, Manufacturer Part Number 1=RC0805FR-071KL, Max Operating Temperature=155°C, Min Operating Temperature=-55°C, Power Rating=125mW, Resistance=1K, Supplier Part Number 1=311-1.00KCRCT-ND, Tolerance=1%, Supplier 1=Digi-Key, Termination=SMD/SMT

## Via types
v1: diameter 50, hole 28, Top Layer to Bottom Layer, tented both sides, 96 vias
v2: diameter 50, hole 28, Top Layer to Bottom Layer, 15 vias

## Nets (pads, with @x,y where several pads share a name; then routed paths per layer and width w, separated by ;. In a path a pad name is that pad's centre, name@x,y a point inside that pad or via, vN(x,y) a via of type N, cw(c..) or ccw(c..) an arc to the next point about the centre after c; other vN are vias at no path point)
24V: D1.4 D2.4 D3.4 D4.4 D5.4 D6.4 D7.4 D8.4 D9.4 D10.4 D11.4 D12.4 D13.4 D14.4 D15.4 D16.4 D17.4 D18.4 D19.4 D20.4 D21.4 D22.4 D23.4 D24.4 D25.4 D26.4 D27.4 D28.4 D29.4 D30.4 D31.4 D32.4 F1.1 | length 2006.1
  Bottom Layer w8: D23.4@2450,-1473.13 D23.4
  Bottom Layer w20: v1(320.96,-3727.17) D28.4 ; v1(320.96,-2660.5) D25.4 ; v1(320.96,-1593.83) D21.4 ; 320.96,-527.17 D17.4 ; v1(1387.63,-3727.17) D30.4 ; v1(1387.63,-2656.86) D26.4 ; v1(1387.63,-1593.83) D22.4 ; 1387.63,-527.17 D18.4 ; v1(2454.3,-3727.17) D31.4 ; v1(2454.3,-2656.86) D27.4 ; v1(2454.3,-1593.83) D23.4 ; 2454.3,-527.17 D19.4 ; v1(2970.96,-1027.17) D24.4 ; v1(2975.96,-3227.17) D29.4 ; v1(3520.96,-3727.17) D32.4 ; 3520.96,-527.17 D20.4
  other v1: 320.96,-552.17 1387.63,-552.17 2454.3,-552.17 3520.96,-552.17
24V_BLUE: Q3.3 R1.2 R2.2 R3.2 R10.2 R11.2 R12.2 R20.1 R21.1 R22.1 R30.2 R31.2 R32.2 R39.1 R40.2 R46.2 R47.2 R52.2 R53.2 R54.2 R61.2 R62.2 R63.2 R70.2 R71.2 R72.2 R79.2 R80.2 R81.2 R88.2 R89.2 R94.2 R95.2 | length 4000
  Top Layer w20: v1(504.04,-3698.03) R39.1 ; v1(504.04,-2631.36) R22.1 ; v1(504.04,-1564.7) R11.2 ; v1(504.04,-523.03) R1.2 ; v1(1570.7,-3698.03) R40.2 ; v1(1570.7,-2631.36) R30.2 ; v1(1570.7,-1564.7) R12.2 ; v1(1570.7,-523.03) R2.2 ; v1(2637.37,-3698.03) R46.2 ; v1(2637.37,-2631.36) R31.2 ; v1(2637.37,-1564.7) R20.1 ; v1(2637.37,-523.03) R3.2 ; v1(3154.04,-3198.03) R32.2 ; v1(3154.04,-998.03) R21.1 ; v1(3704.04,-3698.03) R47.2 ; v1(3704.04,-523.03) R10.2
  Bottom Layer w20: v1(195.96,-3698.03) R81.2 ; v1(195.96,-2631.37) R72.2 ; v1(195.96,-1564.7) R62.2 ; 195.96,-498.03 R52.2 ; v1(1262.63,-3698.03) R89.2 ; v1(1262.63,-2627.72) R79.2 ; v1(1262.63,-1564.7) R63.2 ; 1262.63,-498.03 R53.2 ; v1(2329.3,-3698.03) R94.2 ; v1(2329.3,-2627.72) R80.2 ; v1(2329.3,-1564.7) R70.2 ; 2329.3,-498.03 R54.2 ; v1(2845.96,-998.03) R71.2 ; v1@2850.96,-3198.03 R88.2 ; v1(3395.96,-3698.03) R95.2 ; 3395.96,-498.03 R61.2
  other v1: 2850,-3210 195.96,-523.03 1262.63,-523.03 2329.3,-523.03 3395.96,-523.03
  other v2: 2880,-2260 3020,-2260 2950,-2165 2880,-2070 3020,-2070
24V_GREEN: Q2.3 R5.2 R7.2 R9.2 R14.2 R16.2 R18.2 R24.2 R26.2 R28.2 R34.2 R36.2 R38.2 R43.2 R45.2 R49.2 R51.2 R56.2 R58.2 R60.2 R65.2 R67.2 R69.2 R74.2 R76.2 R78.2 R83.2 R85.2 R87.2 R91.2 R93.2 R97.2 R99.2 | length 4140
  Top Layer w20: R43.2 v1(561.16,-3372.84) ; R28.2 v1(561.16,-2306.17) ; R16.2 v1(561.16,-1239.5) ; R5.2 v1(561.16,-197.84) ; R45.2 v1(1627.83,-3372.84) ; R34.2 v1(1627.83,-2306.17) ; R18.2 v1(1627.83,-1239.5) ; R7.2 v1(1627.83,-197.84) ; R49.2 v1(2694.49,-3372.84) ; R36.2 v1(2694.49,-2306.17) ; R24.2 v1(2694.49,-1239.5) ; R9.2 v1(2694.49,-197.84) ; R38.2 v1(3211.16,-2872.84) ; R26.2 v1(3211.16,-672.84) ; R51.2 v1(3761.16,-3372.84) ; R14.2 v1(3761.16,-205)
  Bottom Layer w20: R87.2 v1(303.84,-3272.83) ; R78.2 v1(303.84,-2206.17) ; R67.2 v1(303.84,-1139.5) ; R56.2@303.84,-172.84 v1(303.84,-97.84) ; R93.2 v1(1370.51,-3272.83) ; R83.2 v1(1370.51,-2202.53) ; R69.2 v1(1370.51,-1139.5) ; R58.2@1370.51,-172.84 v1(1370.51,-97.84) ; R97.2 v1(2437.17,-3272.83) ; R85.2 v1(2437.17,-2202.53) ; R74.2 v1(2437.17,-1139.5) ; R60.2@2437.17,-172.84 v1(2437.17,-97.84) ; R76.2 v1(2953.84,-572.83) ; R91.2 v1(2958.84,-2772.83) ; R99.2 v1(3503.84,-3272.83) ; R65.2@3503.84,-172.84 v1(3503.84,-97.84)
  other v2: 2880,-1910 3020,-1910 2950,-1810 2880,-1710 3020,-1710
24V_RED: Q1.3 R4.1 R6.1 R8.1 R13.1 R15.1 R17.1 R23.2 R25.1 R27.1 R33.1 R35.1 R37.1 R42.1 R44.1 R48.1 R50.1 R55.1 R57.1 R59.1 R64.1 R66.1 R68.1 R73.1 R75.1 R77.1 R82.1 R84.1 R86.1 R90.1 R92.1 R96.1 R98.1 | length 2012
  Top Layer w20: R42.1 v1(180,-3401.97) ; R27.1 v1(180,-2335.3) ; R15.1 v1(180,-1268.63) ; R4.1 v1(180,-226.97) ; R44.1 v1(1246.67,-3401.97) ; R33.1 v1(1246.67,-2335.3) ; R17.1 v1(1246.67,-1268.63) ; R6.1 v1(1246.67,-226.97) ; R48.1 v1(2313.33,-3401.97) ; R35.1 v1(2313.33,-2335.3) ; R23.2 v1(2313.33,-1268.63) ; R8.1 v1(2313.33,-226.97) ; R37.1 v1(2830,-2901.97) ; R25.1 v1@2830,-690 ; R50.1 v1(3380,-3401.97) ; R13.1 v1(3380,-226.97)
  other v1: 2830,-701.97
  other v2: 2880,-1540 3020,-1540 2950,-1445 2880,-1350 3020,-1350
BLUE_ENABLE: J2.3 Q3.1 R41.2 | length 533.4
  Top Layer w20: Q3.1 R41.2 3508.31,-2160.39 J2.3
GND: J1.2 J2.4 Q1.2 Q2.2 Q3.2 R19.1 R29.1 R41.1
GREEN_ENABLE: J2.2 Q2.1 R29.2 | length 477.4
  Top Layer w20: Q2.1 R29.2 3380.85,-1802.7 3669.15,-1802.7 J2.2 ; J2.2@3694.15,-1802.7 J2.2@3700,-1796.85
NetD1_1: D1.1 R4.2 | length 141
  Top Layer w20: R4.2 D1.1
NetD1_2: D1.2 R5.1 | length 125
  Top Layer w20: D1.2 R5.1
NetD1_3: D1.3 R1.1 | length 125
  Top Layer w20: D1.3 R1.1
NetD2_1: D2.1 R6.2 | length 141
  Top Layer w20: R6.2 D2.1
NetD2_2: D2.2 R7.1 | length 125
  Top Layer w20: D2.2 R7.1
NetD2_3: D2.3 R2.1 | length 125
  Top Layer w20: D2.3 R2.1
NetD3_1: D3.1 R8.2 | length 141
  Top Layer w20: R8.2 D3.1
NetD3_2: D3.2 R9.1 | length 125
  Top Layer w20: D3.2 R9.1
NetD3_3: D3.3 R3.1 | length 125
  Top Layer w20: D3.3 R3.1
NetD4_1: D4.1 R13.2 | length 141
  Top Layer w20: R13.2 D4.1
NetD4_2: D4.2 R14.1 | length 117.8
  Top Layer w20: D4.2 R14.1
NetD4_3: D4.3 R10.1 | length 125
  Top Layer w20: D4.3 R10.1
NetD5_1: D5.1 R15.2 | length 141
  Top Layer w20: R15.2 D5.1
NetD5_2: D5.2 R16.1 | length 125
  Top Layer w20: D5.2 R16.1
NetD5_3: D5.3 R11.1 | length 125
  Top Layer w20: D5.3 R11.1
NetD6_1: D6.1 R17.2 | length 141
  Top Layer w20: R17.2 D6.1
NetD6_2: D6.2 R18.1 | length 125
  Top Layer w20: D6.2 R18.1
NetD6_3: D6.3 R12.1 | length 125
  Top Layer w20: D6.3 R12.1
NetD7_1: D7.1 R23.1 | length 141
  Top Layer w20: R23.1 D7.1
NetD7_2: D7.2 R24.1 | length 125
  Top Layer w20: D7.2 R24.1
NetD7_3: D7.3 R20.2 | length 125
  Top Layer w20: D7.3 R20.2
NetD8_1: D8.1 R25.2 | length 141
  Top Layer w20: R25.2 D8.1
NetD8_2: D8.2 R26.1 | length 125
  Top Layer w20: D8.2 R26.1
NetD8_3: D8.3 R21.2 | length 125
  Top Layer w20: D8.3 R21.2
NetD9_1: D9.1 R27.2 | length 141
  Top Layer w20: R27.2 D9.1
NetD9_2: D9.2 R28.1 | length 125
  Top Layer w20: D9.2 R28.1
NetD9_3: D9.3 R22.2 | length 125
  Top Layer w20: D9.3 R22.2
NetD10_1: D10.1 R33.2 | length 141
  Top Layer w20: R33.2 D10.1
NetD10_2: D10.2 R34.1 | length 125
  Top Layer w20: D10.2 R34.1
NetD10_3: D10.3 R30.1 | length 125
  Top Layer w20: D10.3 R30.1
NetD11_1: D11.1 R35.2 | length 141
  Top Layer w20: R35.2 D11.1
NetD11_2: D11.2 R36.1 | length 125
  Top Layer w20: D11.2 R36.1
NetD11_3: D11.3 R31.1 | length 125
  Top Layer w20: D11.3 R31.1
NetD12_1: D12.1 R37.2 | length 141
  Top Layer w20: R37.2 D12.1
NetD12_2: D12.2 R38.1 | length 125
  Top Layer w20: D12.2 R38.1
NetD12_3: D12.3 R32.1 | length 125
  Top Layer w20: D12.3 R32.1
NetD13_1: D13.1 R42.2 | length 141
  Top Layer w20: R42.2 D13.1
NetD13_2: D13.2 R43.1 | length 125
  Top Layer w20: D13.2 R43.1
NetD13_3: D13.3 R39.2 | length 125
  Top Layer w20: D13.3 R39.2
NetD14_1: D14.1 R44.2 | length 141
  Top Layer w20: R44.2 D14.1
NetD14_2: D14.2 R45.1 | length 125
  Top Layer w20: D14.2 R45.1
NetD14_3: D14.3 R40.1 | length 125
  Top Layer w20: D14.3 R40.1
NetD15_1: D15.1 R48.2 | length 141
  Top Layer w20: R48.2 D15.1
NetD15_2: D15.2 R49.1 | length 125
  Top Layer w20: D15.2 R49.1
NetD15_3: D15.3 R46.1 | length 125
  Top Layer w20: D15.3 R46.1
NetD16_1: D16.1 R50.2 | length 141
  Top Layer w20: R50.2 D16.1
NetD16_2: D16.2 R51.1 | length 125
  Top Layer w20: D16.2 R51.1
NetD16_3: D16.3 R47.1 | length 125
  Top Layer w20: D16.3 R47.1
NetD17_1: D17.1 R55.2 | length 125.9
  Bottom Layer w20: D17.1 380.12,-401.08 502.95,-401.08 R55.2
NetD17_2: D17.2 R56.1 | length 125
  Bottom Layer w20: D17.2 R56.1@379.04,-172.84
NetD17_3: D17.3 R52.1 | length 125
  Bottom Layer w20: R52.1 D17.3
NetD18_1: D18.1 R57.2 | length 125.9
  Bottom Layer w20: D18.1 1446.78,-401.08 1569.62,-401.08 R57.2
NetD18_2: D18.2 R58.1 | length 125
  Bottom Layer w20: D18.2 R58.1@1445.7,-172.84
NetD18_3: D18.3 R53.1 | length 125
  Bottom Layer w20: R53.1 D18.3
NetD19_1: D19.1 R59.2 | length 125.9
  Bottom Layer w20: D19.1 2513.45,-401.08 2636.29,-401.08 R59.2
NetD19_2: D19.2 R60.1 | length 125
  Bottom Layer w20: D19.2 R60.1@2512.37,-172.84
NetD19_3: D19.3 R54.1 | length 125
  Bottom Layer w20: R54.1 D19.3
NetD20_1: D20.1 R64.2 | length 140.9
  Bottom Layer w20: D20.1 3580.12,-401.08 3717.92,-401.08 R64.2@3719,-400
NetD20_2: D20.2 R65.1 | length 125
  Bottom Layer w20: D20.2 R65.1@3579.04,-172.84
NetD20_3: D20.3 R61.1 | length 125
  Bottom Layer w20: R61.1 D20.3
NetD21_1: D21.1 R66.2 | length 125.9
  Bottom Layer w20: D21.1 380.12,-1467.75 502.95,-1467.75 R66.2
NetD21_2: D21.2 R67.1 | length 125
  Bottom Layer w20: D21.2 R67.1
NetD21_3: D21.3 R62.1 | length 125
  Bottom Layer w20: R62.1 D21.3
NetD22_1: D22.1 R68.2 | length 125.9
  Bottom Layer w20: D22.1 1446.78,-1467.75 1569.62,-1467.75 R68.2
NetD22_2: D22.2 R69.1 | length 125
  Bottom Layer w20: D22.2 R69.1
NetD22_3: D22.3 R63.1 | length 125
  Bottom Layer w20: R63.1 D22.3
NetD23_1: D23.1 R73.2 | length 125.9
  Bottom Layer w20: D23.1 2513.45,-1467.75 2636.29,-1467.75 R73.2
NetD23_2: D23.2 R74.1 | length 125
  Bottom Layer w20: D23.2 R74.1
NetD23_3: D23.3 R70.1 | length 125
  Bottom Layer w20: R70.1 D23.3
NetD24_1: D24.1 R75.2 | length 125.9
  Bottom Layer w20: D24.1 3030.12,-901.08 3152.95,-901.08 R75.2
NetD24_2: D24.2 R76.1 | length 108.4
  Bottom Layer w20: R76.1@3027.6,-690 3029.04,-691.44 D24.2
NetD24_3: D24.3 R71.1 | length 125
  Bottom Layer w20: R71.1 D24.3
NetD25_1: D25.1 R77.2 | length 125.9
  Bottom Layer w20: D25.1 380.12,-2534.42 502.95,-2534.42 R77.2
NetD25_2: D25.2 R78.1 | length 125
  Bottom Layer w20: D25.2 R78.1
NetD25_3: D25.3 R72.1 | length 125
  Bottom Layer w20: R72.1 D25.3
NetD26_1: D26.1 R82.2 | length 125.9
  Bottom Layer w20: D26.1 1446.78,-2530.78 1569.62,-2530.78 R82.2
NetD26_2: D26.2 R83.1 | length 125
  Bottom Layer w20: D26.2 R83.1
NetD26_3: D26.3 R79.1 | length 125
  Bottom Layer w20: R79.1 D26.3
NetD27_1: D27.1 R84.2 | length 125.9
  Bottom Layer w20: D27.1 2513.45,-2530.78 2636.29,-2530.78 R84.2
NetD27_2: D27.2 R85.1 | length 125
  Bottom Layer w20: D27.2 R85.1
NetD27_3: D27.3 R80.1 | length 125
  Bottom Layer w20: R80.1 D27.3
NetD28_1: D28.1 R86.2 | length 125.9
  Bottom Layer w20: D28.1 380.12,-3601.08 502.95,-3601.08 R86.2
NetD28_2: D28.2 R87.1 | length 125
  Bottom Layer w20: D28.2 R87.1
NetD28_3: D28.3 R81.1 | length 125
  Bottom Layer w20: R81.1 D28.3
NetD29_1: D29.1 R90.2 | length 125.9
  Bottom Layer w20: D29.1 3035.12,-3101.08 3157.95,-3101.08 R90.2
NetD29_2: D29.2 R91.1 | length 125
  Bottom Layer w20: D29.2 R91.1
NetD29_3: D29.3 R88.1 | length 125
  Bottom Layer w20: R88.1 D29.3
NetD30_1: D30.1 R92.2 | length 125.9
  Bottom Layer w20: D30.1 1446.78,-3601.08 1569.62,-3601.08 R92.2
NetD30_2: D30.2 R93.1 | length 125
  Bottom Layer w20: D30.2 R93.1
NetD30_3: D30.3 R89.1 | length 125
  Bottom Layer w20: R89.1 D30.3
NetD31_1: D31.1 R96.2 | length 125.9
  Bottom Layer w20: D31.1 2513.45,-3601.08 2636.29,-3601.08 R96.2
NetD31_2: D31.2 R97.1 | length 125
  Bottom Layer w20: D31.2 R97.1
NetD31_3: D31.3 R94.1 | length 125
  Bottom Layer w20: R94.1 D31.3
NetD32_1: D32.1 R98.2 | length 125.9
  Bottom Layer w20: D32.1 3580.12,-3601.08 3702.95,-3601.08 R98.2
NetD32_2: D32.2 R99.1 | length 125
  Bottom Layer w20: D32.2 R99.1
NetD32_3: D32.3 R95.1 | length 125
  Bottom Layer w20: R95.1 D32.3
NetF1_2: F1.2 J1.1
RED_ENABLE: J2.1 Q1.1 R19.2 | length 523.7
  Top Layer w20: Q1.1 R19.2 3531.69,-1456.69 J2.1
pads on no net: MH1.0 MH2.0

## Polygon pours and split planes (outlines as drawn)
24V on Top Layer "24V_L01_P048" (solid, pour order 48): 0,-17.28 0,-3913.49 3898.14,-3913.49 3898.14,-15.85
GND on Top Layer "GND_L01_P047" (solid, pour order 47): 3260,-2200 3260,-2320 3495,-2320 3495,-2600 3882.16,-2600 3882.16,-1390 3075,-1390 3075,-2200
24V_RED on Top Layer "24V_REDMOS" (solid, pour order 38): 3230,-1490 3080,-1490 3080,-1300 2830,-1300 2830,-1600 3230,-1600
24V_BLUE on Top Layer "24V_BLUEMOS" (solid, pour order 45): 3250,-2210 3080,-2210 3080,-2010 2830,-2010 2830,-2320 3240,-2320 3250,-2320
24V_GREEN on Top Layer "24V_GREENMOS" (solid, pour order 40): 3240,-1860 3080,-1860 3080,-1650 2830,-1650 2830,-1960 3240,-1960
NetF1_2 on Top Layer "Fuse Connection" (solid, pour order 32): 3300,-2610 3880,-2610 3880,-2760 3300,-2760
24V_RED on Bottom Layer "24V_RED_L04_P012" (solid, pour order 12): 36.6,170 36.6,-4250 76.6,-4290 4276.6,-4290 4276.6,170
24V_GREEN on Layer 2 "24V_GREEN_L03_P011" (solid, pour order 11): 0,150 0,-4260 4260,-4260 4400,-4120 4230,-3950 4230,160
24V_BLUE on Layer 1 "24V_BLUE_L02_P008" (solid, pour order 8): 0,-2.36 0,-3900.5 3898.14,-3900.5 3898.14,-2.86

## Silkscreen, mask and mechanical layers (free items; w line width, h text height)
Mechanical 1:
  circle w0.5: c3661.92,-790.26 r59.06
  circle w0.5: c3661.92,-3113.1 r59.06
  lines w0.5: 0.5,-120.97 cw(c118.61,-120.97) 118.61,-2.86 ; 3780.03,-3900.5 ccw(c3780.03,-3782.39) 3898.14,-3782.39 ; 3780.03,-2.86 cw(c3780.03,-120.97) 3898.14,-120.97